# Altium PCB PCB_KeyScreen2.PcbDoc
Units mil, origin at the board's own origin, x right, y up, seen from the top; angles counter-clockwise.
Board outline 2430 x 3975 mil, 2 copper layers (Top Layer, Bottom Layer); 34 components, 26 nets, 148 pads, 12 vias.
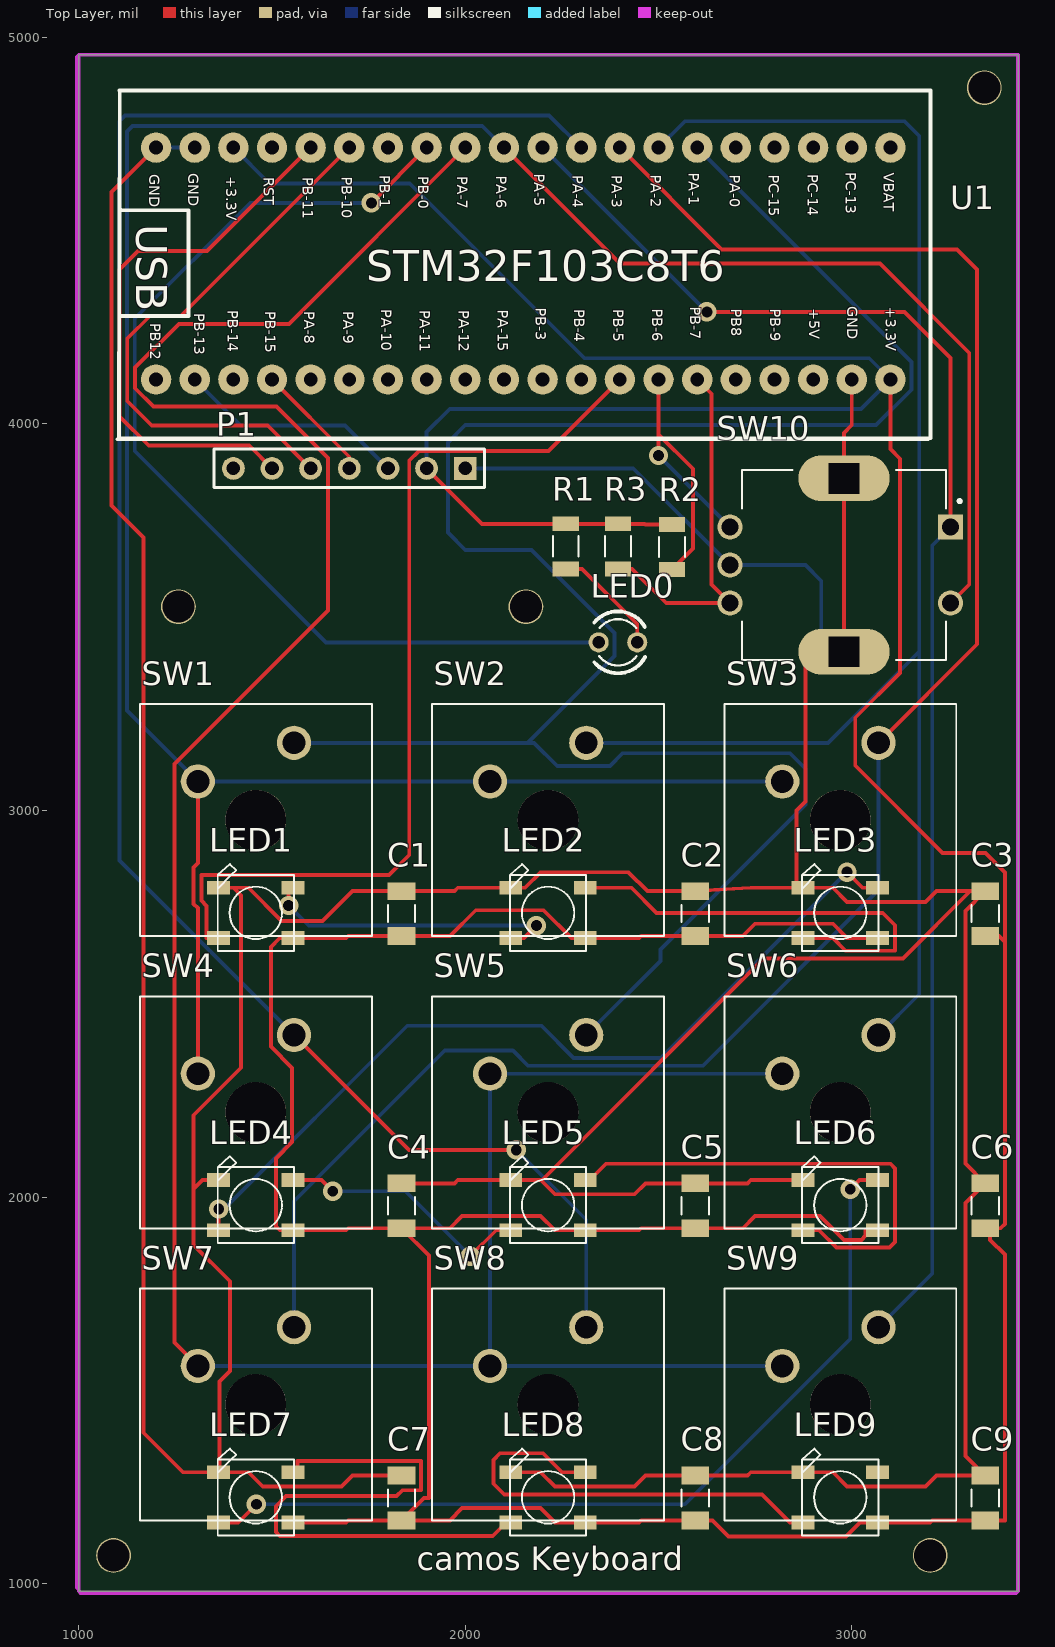
[diagram p0: Top Layer view]
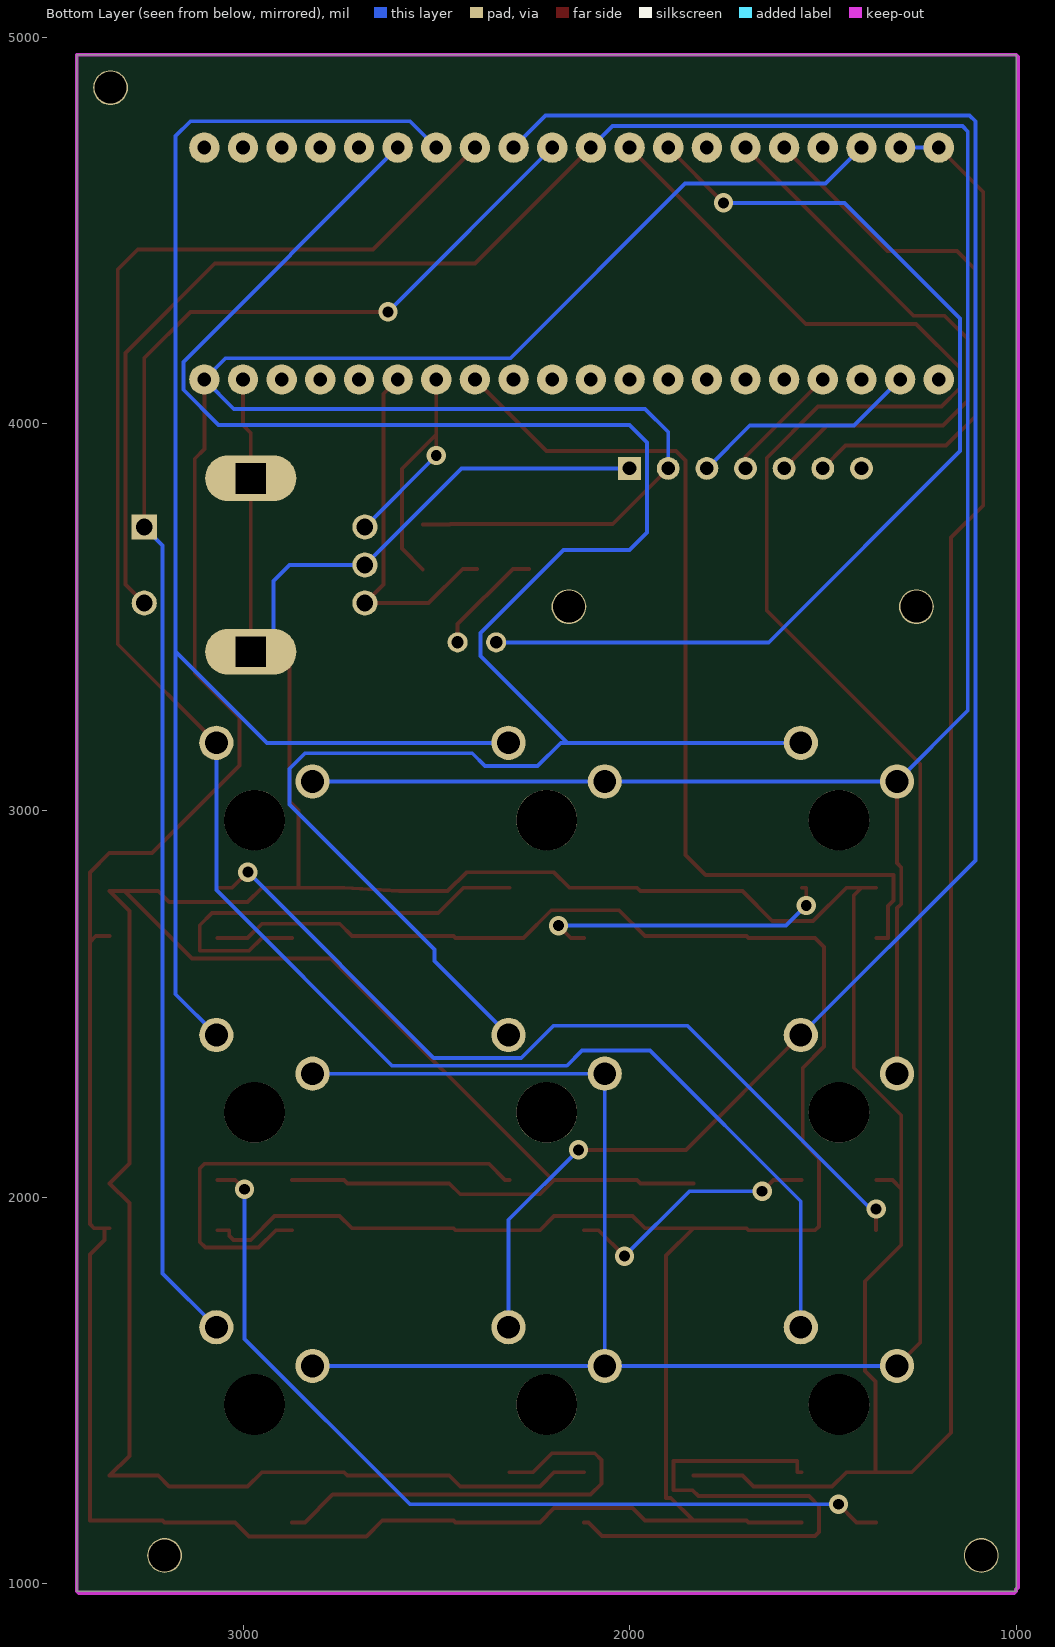
[diagram p1: Bottom Layer view, seen from below]
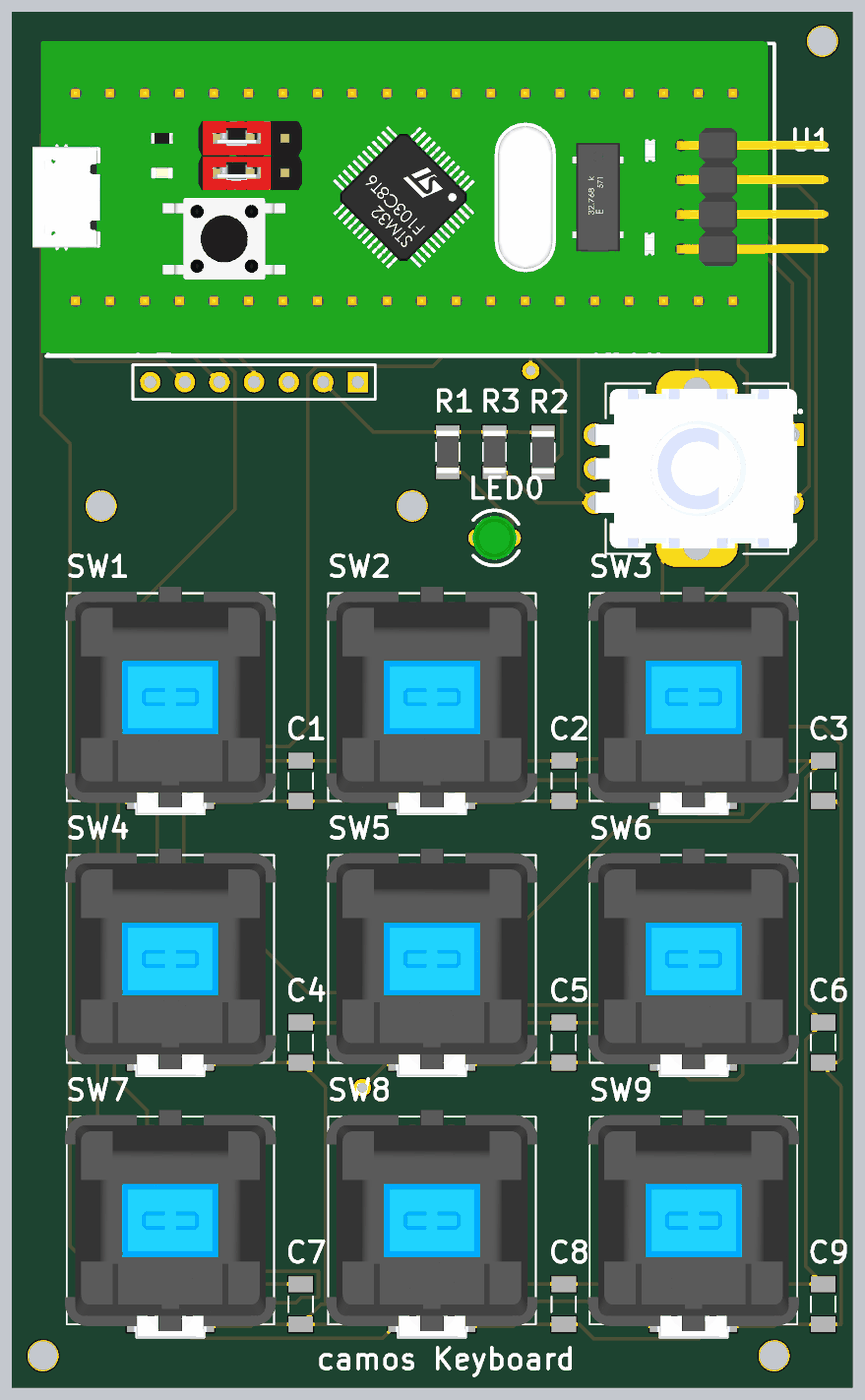
[diagram p2: 3D render of the assembled board from above, using the file's embedded part models]

## Layer stack, top to bottom
Top Solder: solder mask 0.4, Solder Resist, Dk 3.5
Top Layer: signal copper 1.4
Dielectric 1: dielectric 12.6, FR-4, Dk 4.8
Bottom Layer: signal copper 1.4
Bottom Solder: solder mask 0.4, Solder Resist, Dk 3.5

## Board outline
1000,980 1000,4955 3430,4955 3430,980
board region "Default Layer Stack Region": 1000,980 1000,4955 3430,4955 3430,980
board region "Default Layer Stack Region": 1000,980 1000,4955 3430,4955 3430,980
board region "Layer Stack Region 1": 1000,980 1000,4955 3430,4955 3430,980

## Design rules (kind name [scope] priority, off if disabled: settings)
Clearance [All] p1: gap=10 ignorepadtopadclearanceinfootprint=FALSE except(0: Arc-Hole Track-Hole SMDPad-Hole THPad-Hole Via-Hole Fill-Hole Poly-Hole Region-Hole Text-Hole)
PolygonConnect [All] p1: connectstyle=Relief reliefconductorwidth=10 reliefentries=4 polygonreliefangle="90 Angle" airgapwidth=10
RoutingVias [All] p1: holewidth=28 width=50 viastyle="Through Hole" minholewidth=28 minwidth=50 maxholewidth=28 maxwidth=50
SolderMaskExpansion [All] p1: expansion=4 istentingtop=FALSE
Width [All] p1: maxlimit=10 minlimit=10 preferedwidth=10
30 further rules are at their usual default settings.

## Components (designator, comment, footprint, x,y, rotation, side; value= is the part's Value field where it differs from the comment)
C1 "C1206" CAPC3216X110N 1835,2733.23 r270 top
C2 "C1206" CAPC3216X110N 2595,2733.23 r270 top
C3 "C1206" CAPC3216X110N 3345,2733.23 r270 top
C4 "C1206" CAPC3216X110N 1835,1977.23 r270 top
C5 "C1206" CAPC3216X110N 2595,1977.23 r270 top
C6 "C1206" CAPC3216X110N 3345,1977.23 r270 top
C7 "C1206" CAPC3216X110N 1835,1221.23 r270 top
C8 "C1206" CAPC3216X110N 2595,1221.23 r270 top
C9 "C1206" CAPC3216X110N 3345,1221.23 r270 top
LED0 "3mm" LED3MM 2395,3435 r180 top
LED1 "WS2812B" WS2812B 1458.15,2735 r0 top
LED2 "WS2812B" WS2812B 2214.15,2735 r0 top
LED3 "WS2812B" WS2812B 2970.15,2735 r0 top
LED4 "WS2812B" WS2812B 1458.15,1979 r0 top
LED5 "WS2812B" WS2812B 2214.15,1979 r0 top
LED6 "WS2812B" WS2812B 2970.15,1979 r0 top
LED7 "WS2812B" WS2812B 1458.15,1223 r0 top
LED8 "WS2812B" WS2812B 2214.15,1223 r0 top
LED9 "WS2812B" WS2812B 2970.15,1223 r0 top
P1 "Header 7" HDR1X7 2000,3885 r180 top
R1 "220" RESC3116X65N 2260,3683.27 r270 top
R2 "10k" RESC3116X65N 2535,3681.73 r270 top
R3 "10k" RESC3116X65N 2395,3683.27 r270 top
SW1 "MX1A-11NN" CHERRY_MX1A-11NN_SWITCH 1458.15,2975 r0 top
SW2 "MX1A-11NN" CHERRY_MX1A-11NN_SWITCH 2214.15,2975 r0 top
SW3 "MX1A-11NN" CHERRY_MX1A-11NN_SWITCH 2970.15,2975 r0 top
SW4 "MX1A-11NN" CHERRY_MX1A-11NN_SWITCH 1458.15,2219 r0 top
SW5 "MX1A-11NN" CHERRY_MX1A-11NN_SWITCH 2214.15,2219 r0 top
SW6 "MX1A-11NN" CHERRY_MX1A-11NN_SWITCH 2970.15,2219 r0 top
SW7 "MX1A-11NN" CHERRY_MX1A-11NN_SWITCH 1458.15,1463 r0 top
SW8 "MX1A-11NN" CHERRY_MX1A-11NN_SWITCH 2214.15,1463 r0 top
SW9 "MX1A-11NN" CHERRY_MX1A-11NN_SWITCH 2970.15,1463 r0 top
SW10 "PEC11R-4215F-S0024" XDCR_PEC11R-4215F-S0024 2980,3635 r270 top
U1 "STM32F103C8T6_Board" PCBComponent_1 1045,4880 r0 top

## Footprints (in the part's own frame and the unit in brackets; to place one, negate y for a bottom-side part, rotate by r counter-clockwise, add the part's x,y. Pads: shape width x height; smd on the part's side, far side on the other; paste and mask are expansions set on the pad)
CAPC3216X110N [mm]
  rect 1.16x1.82 smd: 1(-1.475,0) 2(1.475,0)
  silkscreen extent -0.57,-0.9 0.57,0.9
CHERRY_MX1A-11NN_SWITCH [mm]
  round 2.25 hole 1.5: P$1(2.51,5.08) P$2(-3.81,2.54)
  round 3.988 hole 3.988 unplated: ""(0,0)
  silkscreen extent -7.62,-7.62 7.62,7.62, body extent -7.75,-8.1 7.75,8.1, height 15.24
HDR1X7 [mm] "Connector; Header; 7 Position"
  rect 1.5x1.5 hole 0.9: 1(0,0)
  round 1.5 hole 0.9: 2(2.54,0) 3(5.08,0) 4(7.62,0) 5(10.16,0) 6(12.7,0) 7(15.24,0)
  silkscreen extent -1.27,-1.27 16.51,1.27
LED3MM [mil]
  round 52 hole 32: A(-50,0) K(50,0)
  silkscreen extent -71,-80 61,80, body extent -63,-63 63,63, height 240
PCBComponent_1 [mil]
  round 78.74 hole 35.4 paste+0 mask+2: 1(2055,-165) 2(1955,-165) 3(1855,-165) 4(1755,-165) 5(1655,-165) 6(1555,-165) 7(1455,-165) 8(1355,-165) 9(1255,-165) 10(1155,-165) 11(1055,-165) 12(955,-165) 13(855,-165) 14(755,-165) 15(655,-165) 16(555,-165) 17(455,-165) 18(355,-165) 19(255,-165) 20(155,-165) 21(155,-765) 22(255,-765) 23(355,-765) 24(455,-765) 25(555,-765) 26(655,-765) 27(755,-765) 28(855,-765) 29(955,-765) 30(1055,-765) 31(1155,-765) 32(1255,-765) 33(1355,-765) 34(1455,-765) 35(1555,-765) 36(1655,-765) 37(1755,-765) 38(1855,-765) 39(1955,-765) 40(2055,-765)
  Top Layer lines w10: 1952,-151 1960,-159
  silkscreen extent 54,-920 2158,-17, body extent 14,-911 2314,-11, height 554
RESC3116X65N [mm]
  rect 0.97x1.73 smd: 1(-1.48,0) 2(1.48,0)
  silkscreen extent -0.67,-0.85 0.67,0.85, body extent -1.55,-0.8 1.55,0.8, height 0.65
WS2812B [mm]
  rect 1.5x0.9 smd: 1-VDD(2.45,-1.65) 2-DOUT(2.45,1.65) 3-GND(-2.45,1.65) 4-DIN(-2.45,-1.65)
  silkscreen extent -2.5,-2.5 2.5,3.2, body extent -2.7,-2.5 2.7,2.5, height 1.62
XDCR_PEC11R-4215F-S0024 [mm]
  rect 1.65x1.65 hole 1.1: 1(-2.5,7)
  round 1.65 hole 1.1: 2(2.5,7) A(-2.5,-7.5) B(2.5,-7.5) COM(0,-7.5)
  oval 3x6 hole 2 square: S1(-5.7,0) S2(5.7,0)
  silkscreen extent -6.25,-6.7 6.25,7.7, body extent -5.85,-7.5 5.85,7.35, height 26.6

## Part data
C1 C2 C3 C4 C5 C6 C7 C8 C9: library part C1206C105K5RACTU, "1ÂµF Â±10% 50V Ceramic Capacitor X7R 1206 _3216 Metric_", Package="3216 KEMET", Digi-Key_Part_Number=399-8147-1-ND, Digi-Key_Purchase_URL=https://www.digikey.com/product-detail/en/kemet/C1206C105K5RACTU/399-8147-1-ND/3471870?utm_source=snapeda&utm_medium=aggregator&utm_campaign=symbol, MF=KEMET, MP=C1206C105K5RACTU, SnapEDA_Link=https://www.snapeda.com/parts/C1206C105K5RACTU/KEMET/view-part/357507/?ref=snap
LED0: library part TLLG4400, "Green 569nm LED Indication - Discrete 1.9V Radial", Package=None, Availability="In Stock", Check_prices=https://www.snapeda.com/parts/TLLG4400/Vishay/view-part/?ref=eda, MF="Vishay Semiconductors", MP=TLLG4400, Price=None, Purchase-URL=https://pricing.snapeda.com/search/part/TLLG4400/?ref=eda, SnapEDA_Link=https://www.snapeda.com/parts/TLLG4400/Vishay/view-part/?ref=snap
LED1 LED2 LED3 LED4 LED5 LED6 LED7 LED8 LED9: "Raspberry Pi HAT _40 pin_ Wheeled Robotics Kit", Package=None, Availability=Unavailable, MF="SparkFun Electronics", MP=WS2812B, Price=None, SnapEDA_Link=https://www.snapeda.com/parts/WS2812B/Worldsemi/view-part/1038297/?ref=snap
P1: "Header, 7-Pin", LatestRevisionDate=17-Jul-2002, LatestRevisionNote="Re-released for DXP Platform.", Publisher="Altium Limited"
R1 R2 R3: library part Res-SMD, "Resistor", Manufacturer="Generic Components", Class=Passive, Published=08/06/2000, Publisher="Altium Hobart Technology Centre"
SW1 SW2 SW3 SW4 SW5 SW6 SW7 SW8 SW9: "Pushbutton Switch SPST-NO Keyswitch Panel Mount, Front", Package=None, Availability="In Stock", Check_prices=https://www.snapeda.com/parts/MX1A-11NN/Cherry/view-part/?ref=eda, MF=Cherry, MP=MX1A-11NN, Price=None, Purchase-URL=https://pricing.snapeda.com/search/part/MX1A-11NN/?ref=eda, SnapEDA_Link=https://www.snapeda.com/parts/MX1A-11NN/Cherry/view-part/?ref=snap
SW10: "Incremental Encoder, 12 Mm, Contact Rating 10 Ma - 5 Vdc", Package=None, Availability=Unavailable, MP=PEC11R-4215F-S0024, Price=None
U1: library part "STM32F103C8T6_Blue pill", Manufacturer Part=STM32Duino, Contributor=Johan_a, spicePre=U, spiceSymbolName="STM32F103C8T6_Development_Board copy"

## Free pads (board coordinates)
  round 90 hole 83: 1(2156.92,3527.21) 1(3342.78,4870) 2(1257.78,3527.21) 3(1090,1072.67) 4(3202.78,1072.67)

## Via types
v1: diameter 50, hole 28, Top Layer to Bottom Layer, 12 vias

## Nets (pads, with @x,y where several pads share a name; then routed paths per layer and width w, separated by ;. In a path a pad name is that pad's centre, name@x,y a point inside that pad or via, vN(x,y) a via of type N, cw(c..) or ccw(c..) an arc to the next point about the centre after c; other vN are vias at no path point)
A1: SW1.P$1 SW5.P$1 U1.6 | length 5563
  Bottom Layer w10: SW1.P$1 2161,3175 ; SW5.P$1 2505,2611.03 2505,2640 2880,3015 2880,3108 2840,3148 2407,3148 2374,3115 2238,3115 2178,3175 2161,3175 ; U1.6 3154.37,4160.63 3154.37,4088.37 3063,3997 2000,3997 1955,3952 1955,3719 2000,3674 2171,3674 2386,3459 2386,3400 2161,3175
A2: SW2.P$1 SW6.P$1 U1.7 | length 4047
  Bottom Layer w10: SW2.P$1 2938,3175 3174.37,3411.37 ; U1.7 2568,4783 3136,4783 3174.37,4744.63 3174.37,3411.37 ; SW6.P$1 3174.37,2524.4 3174.37,3411.37
A3: SW3.P$1 SW7.P$1 U1.8 | length 4970.1
  Top Layer w10: U1.8 2663.35,4451.65 3272.35,4451.65 3324,4400 3324,3430.03 SW3.P$1
  Bottom Layer w10: SW7.P$1 1556.97,1988.97 1947,2379 2123,2379 2162.29,2339.71 2614.71,2339.71 3068.97,2793.97 SW3.P$1
A4: SW4.P$1 SW8.P$1 U1.9 | length 5018.8
  Top Layer w10: SW4.P$1 1853.97,2122 v1(2132,2122)
  Bottom Layer w10: SW4.P$1 1105,2870.97 1105,4783 1120,4798 2217,4798 U1.9 ; v1(2132,2122) 2312.97,1941.03 SW8.P$1
A5: SW9.P$1 SW10.1 U1.10 | length 3865.9
  Top Layer w10: v1(2625,4290) 3136,4290 3255.59,4170.41 SW10.1
  Bottom Layer w10: U1.10 v1(2625,4290) ; SW9.P$1 3208,1802.03 3208,3685.84 SW10.1
A6: SW1.P$2 SW2.P$2 SW3.P$2 SW4.P$2 SW10.2 U1.11 | length 7130.4
  Top Layer w10: SW4.P$2 1308.15,2747.24 1297.17,2758.23 1297.17,2852.68 1308.15,2863.66 SW1.P$2 ; U1.11 2400,4415 3073,4415 3304,4184 3304,3584.98 SW10.2
  Bottom Layer w10: U1.11 2044,4771 1139,4771 1125,4757 1125,3258.15 SW1.P$2 SW2.P$2 SW3.P$2
A7: SW5.P$2 SW6.P$2 SW7.P$2 SW8.P$2 SW9.P$2 U1.12 | length 7280
  Top Layer w10: SW7.P$2 1248,1623.15 1248,3120 1645,3517 1645,3912 1512,4045 1193,4045 1145.63,4092.37 1145.63,4145.63 1259,4259 1544,4259 U1.12
  Bottom Layer w10: SW7.P$2 SW8.P$2 ; SW9.P$2 SW8.P$2 ; SW6.P$2 SW5.P$2 2064.15,2221.15 2064,2221 2064,1563.15 SW8.P$2
DC: P1.6 U1.16 | length 1455.5
  Top Layer w10: P1.6 1441,3944 1181,3944 1105.63,4019.37 1105.63,4400 1152.89,4447.26 1332.26,4447.26 U1.16
GND: C1.1 C2.1 C3.1 C4.1 C5.1 C6.1 C7.1 C8.1 C9.1 LED1.3-GND LED2.3-GND LED3.3-GND LED4.3-GND LED5.3-GND LED6.3-GND LED7.3-GND LED8.3-GND LED9.3-GND P1.1 SW10.COM SW10.S1 SW10.S2 U1.19 U1.20 U1.39 | length 16227.8
  Top Layer w10: U1.20 1085,4600 1085,3789 1168,3706 1168,1389.96 1270,1287.96 LED7.3-GND LED7.3-GND@1364,1287.96 ; LED4.3-GND 1320,2043.96 1297,2020.96 ; LED1.3-GND 1400,2799.96 ; C7.1 1708,1279.3 1679.7,1251 1476,1251 1439.04,1287.96 LED7.3-GND@1364,1287.96 ; C4.1 1972,2035.3 1980.66,2043.96 LED5.3-GND ; LED8.3-GND 2195,1287.96 2231.96,1251 2438,1251 2466.3,1279.3 C8.1 2730,1279.3 2738.66,1287.96 LED9.3-GND 2951,1287.96 2987.96,1251 3191,1251 3219.3,1279.3 C9.1 3294,1330.3 3294,1984.3 C6.1 3294,2086.3 3294,2740.3 C3.1 3306.3,2791.3 ; LED6.3-GND 2738.66,2043.96 2730,2035.3 C5.1 2466.3,2035.3 2438,2007 2231.96,2007 2196.98,2041.98 ; U1.39 3000,3997 2980,3977 SW10.S1 SW10.S2 2880,3410.59 2880,3023 2856.65,2999.65 LED3.3-GND@2856.65,2799.96 ; 1297,2020.96 1297,2211.49 1420,2334.49 1420,2779.96 1400,2799.96 ; 1297,2020.96 1297,1876 1391,1782 1391,1549.49 1364,1522.49 LED7.3-GND@1364,1287.96 ; 1400,2799.96 1439.04,2799.96 1525,2714 1630.7,2714 1708,2791.3 C1.1 1972,2791.3 1980.66,2799.96 LED2.3-GND 2154.96,2799.96 2195,2840 2422.3,2840 2471,2791.3 C2.1 2738.66,2799.96 LED3.3-GND@2856.65,2799.96 ; LED5.3-GND 2196.98,2041.98 ; LED5.3-GND 2195,2043.96 2196.98,2041.98 ; 2196.98,2041.98 2772,2617 3132,2617 3306.3,2791.3 ; LED3.3-GND@2856.65,2799.96 LED3.3-GND 2951,2799.96 2987.96,2763 3191,2763 3219.3,2791.3 3306.3,2791.3
  Bottom Layer w10: U1.20 U1.19 ; P1.1 2434.72,3885 SW10.COM 2880,3635 2921,3594 2921,3410.59 SW10.S2
LED: LED0.K U1.13 | length 2686.1
  Top Layer w10: v1(1757,4572) U1.13
  Bottom Layer w10: v1(1757,4572) 1444,4572 1145,4273 1145,3930 1640,3435 LED0.K
NetLED0_A: LED0.A R1.2 | length 291.2
  Top Layer w10: R1.2 2302,3625 2445,3482 LED0.A
NetLED1_2-DOUT: LED1.2-DOUT LED2.4-DIN | length 799.6
  Top Layer w10: v1(1543,2754) 1543,2799.96 LED1.2-DOUT ; LED2.4-DIN 2152.04,2670.04 v1(2184,2702)
  Bottom Layer w10: v1(1543,2754) 1595,2702 v1(2184,2702)
NetLED2_2-DOUT: LED2.2-DOUT LED3.4-DIN | length 1159.5
  Top Layer w10: LED2.2-DOUT 2430.04,2799.96 2495,2735 3080,2735 3112,2703 3112,2637 2984.04,2637 2951,2670.04 LED3.4-DIN
NetLED3_2-DOUT: LED3.2-DOUT LED4.4-DIN | length 2206.7
  Top Layer w10: LED4.4-DIN 1362,1914.04 v1(1362,1969) ; v1(2987.5,2840.5) 3028.04,2799.96 LED3.2-DOUT
  Bottom Layer w10: v1(1362,1969) 1376,1969 1850,2443 2197,2443 2280.29,2359.71 2506.71,2359.71 v1(2987.5,2840.5)
NetLED4_2-DOUT: LED4.2-DOUT LED5.4-DIN | length 672.4
  Top Layer w10: LED4.2-DOUT 1628.04,2043.96 v1(1657,2015) ; v1(2013,1847.04) 2080,1914.04 LED5.4-DIN
  Bottom Layer w10: v1(1657,2015) 1845.04,2015 v1(2013,1847.04)
NetLED5_2-DOUT: LED5.2-DOUT LED6.4-DIN | length 1276.8
  Top Layer w10: LED5.2-DOUT 2322,2043.96 2364.04,2086 3100,2086 3112,2074 3112,1884 3097.16,1869.16 2960,1869.16 2915.12,1914.04 LED6.4-DIN
NetLED6_2-DOUT: LED6.2-DOUT LED7.4-DIN | length 2298.6
  Top Layer w10: LED7.4-DIN 1412.65,1158.04 v1(1459.61,1205) ; v1(2996,2020) 3019.96,2043.96 LED6.2-DOUT
  Bottom Layer w10: v1(1459.61,1205) 2568,1205 2996,1633 v1(2996,2020)
NetLED7_2-DOUT: LED7.2-DOUT LED8.4-DIN | length 1522.4
  Top Layer w10: LED7.2-DOUT 1566,1287.96 1566,1317.14 1885.83,1317.14 1885.83,1241.46 1837.46,1241.46 1822,1226 1536,1226 1510,1200 1510,1133 1520,1123 2070.96,1123 2106,1158.04 LED8.4-DIN
NetLED8_2-DOUT: LED8.2-DOUT LED9.4-DIN | length 1169.1
  Top Layer w10: LED8.2-DOUT 2250.04,1287.96 2201,1337 2090,1337 2073,1320 2073,1258 2101,1230 2768,1230 2839.96,1158.04 LED9.4-DIN
PB6: R2.2 SW10.A U1.34 | length 866.9
  Top Layer w10: v1(2500,3918.15) 2500,3973 ; U1.34 2500,3973 ; R2.2 2589,3677.46 2589,3884 2500,3973
  Bottom Layer w10: v1(2500,3918.15) SW10.A
PB7: R3.2 SW10.B U1.35 | length 939.9
  Top Layer w10: R3.2 2431.57,3625 2520,3536.57 SW10.B 2637,3584.3 2637,4078 U1.35
RES: P1.5 U1.15 | length 1487
  Top Layer w10: P1.5 1489,3996 1189,3996 1125.63,4059.37 1125.63,4220.63 1185,4280 1265,4280 U1.15
SCL: P1.3 U1.22 | length 595.3
  Bottom Layer w10: U1.22 1419,3996 1689,3996 P1.3
SDA: P1.4 U1.24 | length 312.8
  Top Layer w10: U1.24 1700,3915 P1.4
STRIP: LED1.4-DIN U1.33 | length 2410.7
  Top Layer w10: LED1.4-DIN 1331,2670.04 1331,2753.17 1317.17,2767 1317.17,2833 1803,2833 1855,2885 1855,3905 1880,3930 2215,3930 U1.33
VCC: C1.2 C2.2 C3.2 C4.2 C5.2 C6.2 C7.2 C8.2 C9.2 LED1.1-VDD LED2.1-VDD LED3.1-VDD LED4.1-VDD LED5.1-VDD LED6.1-VDD LED7.1-VDD LED8.1-VDD LED9.1-VDD P1.2 R1.1 R2.1 R3.1 U1.18 U1.40 | length 14160.8
  Top Layer w10: LED7.1-VDD 1692,1158.04 1697.12,1163.16 C7.2 ; P1.2 2043.46,3741.54 R1.1 R3.1 2464,3741.54 2465.54,3740 R2.1 ; LED6.1-VDD 3035.77,1914.04 3035.77,1900 3024.94,1889.16 2980,1889.16 2918.16,1951 2750,1951 2718.16,1919.16 C5.2 2455.12,1919.16 2450,1914.04 LED5.1-VDD 2232,1914.04 2195.04,1951 1992,1951 1960.16,1919.16 C4.2 ; LED3.1-VDD 2987.96,2670.04 2951,2707 2749.84,2707 2718,2675.16 C2.2 2455.12,2675.16 2450,2670.04 LED2.1-VDD 2274.43,2670.04 2202.47,2742 2027,2742 1960.16,2675.16 C1.2 1697.12,2675.16 1692,2670.04 LED1.1-VDD 1520,2670.04 1497,2647.04 1497,2389 1552,2334 1552,2142 1510,2100 1510,1924.04 1520,1914.04 LED4.1-VDD 1692,1914.04 1697.12,1919.16 C4.2 ; U1.40 3100,3935 3125,3910 3125,3356 3009,3240 3009,3116 3235,2890 3346,2890 3396,2840 3396,2660 ; C6.2 C6.2@3358,1919.16 ; C3.2 3380.84,2675.16 3396,2660 ; C7.2 1893.31,1221.46 1905.83,1221.46 1905.83,1848.33 C4.2 ; C7.2 1960.16,1163.16 1992,1195 2195.04,1195 2232,1158.04 LED8.1-VDD 2450,1158.04 2455.12,1163.16 C8.2 2639.84,1163.16 2681,1122 2984.96,1122 3021,1158.04 LED9.1-VDD 3203,1158.04 3208.12,1163.16 C9.2 3396,1163.16 3396,1851 3358,1889 C6.2@3358,1919.16 ; C6.2@3358,1919.16 3385.16,1919.16 3396,1930 3396,2660
  Bottom Layer w10: U1.18 1493,4622 1856.4,4622 2308.4,4170 3045,4170 U1.40 3024,4039 1960,4039 1900,3979 P1.2
pads on no net: LED9.2-DOUT P1.7 SW1. SW2. SW3. SW4. SW5. SW6. SW7. SW8. SW9. U1.1 U1.2 U1.3 U1.4 U1.5 U1.14 U1.17 U1.21 U1.23 U1.25 U1.26 U1.27 U1.28 U1.29 U1.30 U1.31 U1.32 U1.36 U1.37 U1.38

## Keep-outs
Top Layer:
  lines w10: 1000,980 1005,975 3425,975 3430,980 3430,4955 1000,4955 1000,980
Keep-Out Layer:
  lines w10: 995,990 1000,985 1000,980 1005,975 3425,975 3430,980 3430,4955 1000,4955 995,4950 995,990

## Silkscreen, mask and mechanical layers (free items; w line width, h text height)
Top Overlay:
  text "camos Keyboard" at 1875,1035 h60

## Text inside footprints (layer, text, board x,y; h text height)
U1: Top Overlay "VBAT" at 3083.22,4650 h27.56 r270; Top Overlay "PC-13" at 2984.22,4651 h27.56 r270; Top Overlay "PC-14" at 2886.22,4646 h27.56 r270; Top Overlay "PC-15" at 2785.22,4645 h27.56 r270; Top Overlay "PA-0" at 2684.22,4645 h27.56 r270; Top Overlay "PA-1" at 2578.22,4650 h27.56 r270; Top Overlay "PA-2" at 2480.22,4645 h27.56 r270; Top Overlay "PA-3" at 2379.22,4644 h27.56 r270; Top Overlay "PA-4" at 2278.22,4644 h27.56 r270; Top Overlay "PA-5" at 2178.22,4647 h27.56 r270; Top Overlay "PA-6" at 2080.22,4642 h27.56 r270; Top Overlay "PA-7" at 1979.22,4641 h27.56 r270; Top Overlay "PB-0" at 1878.22,4641 h27.56 r270; Top Overlay "PB-1" at 1778.22,4644 h27.56 r270; Top Overlay "PB-10" at 1680.22,4639 h27.56 r270; Top Overlay "PB-11" at 1579.22,4638 h27.56 r270; Top Overlay "RST" at 1478.22,4638 h27.56 r270; Top Overlay "+3.3V" at 1381.22,4641 h27.56 r270; Top Overlay "GND" at 1283.22,4649 h27.56 r270; Top Overlay "GND" at 1182.22,4646 h27.56 r270; Top Overlay "+3.3V" at 3087.22,4303 h27.56 r270; Top Overlay "GND" at 2988.22,4304 h27.56 r270; Top Overlay "+5V" at 2890.22,4299 h27.56 r270; Top Overlay "PB-9" at 2789.22,4298 h27.56 r270; Top Overlay "PB8" at 2688.22,4298 h27.56 r270; Top Overlay "PB-7" at 2582.22,4303 h27.56 r270; Top Overlay "PB-6" at 2484.22,4298 h27.56 r270; Top Overlay "PB-5" at 2383.22,4297 h27.56 r270; Top Overlay "PB-4" at 2282.22,4297 h27.56 r270; Top Overlay "PB-3" at 2182.22,4300 h27.56 r270; Top Overlay "PA-15" at 2084.22,4295 h27.56 r270; Top Overlay "PA-12" at 1983.22,4294 h27.56 r270; Top Overlay "PA-11" at 1882.22,4294 h27.56 r270; Top Overlay "PA-10" at 1782.22,4297 h27.56 r270; Top Overlay "PA-9" at 1684.22,4292 h27.56 r270; Top Overlay "PA-8" at 1583.22,4291 h27.56 r270; Top Overlay "PB-15" at 1482.22,4291 h27.56 r270; Top Overlay "PB-14" at 1385.22,4294 h27.56 r270; Top Overlay "PB-13" at 1299.22,4287 h27.56 r270; Top Overlay "PB12" at 1185.22,4261 h27.56 r270; Top Overlay "STM32F103C8T6" at 1744,4369 h80; Top Overlay "USB" at 1149.4,4517 h80 r270